# Altium PCB Carte_MiniPAMI 2025.PcbDoc
Units mm, origin at the board's own origin, x right, y up, seen from the top; angles counter-clockwise.
Board outline 21 x 11 mm, 2 copper layers (Component Side, Solder Side), stack 1.57 mm thick; 21 components, 12 nets, 51 pads, 19 vias.
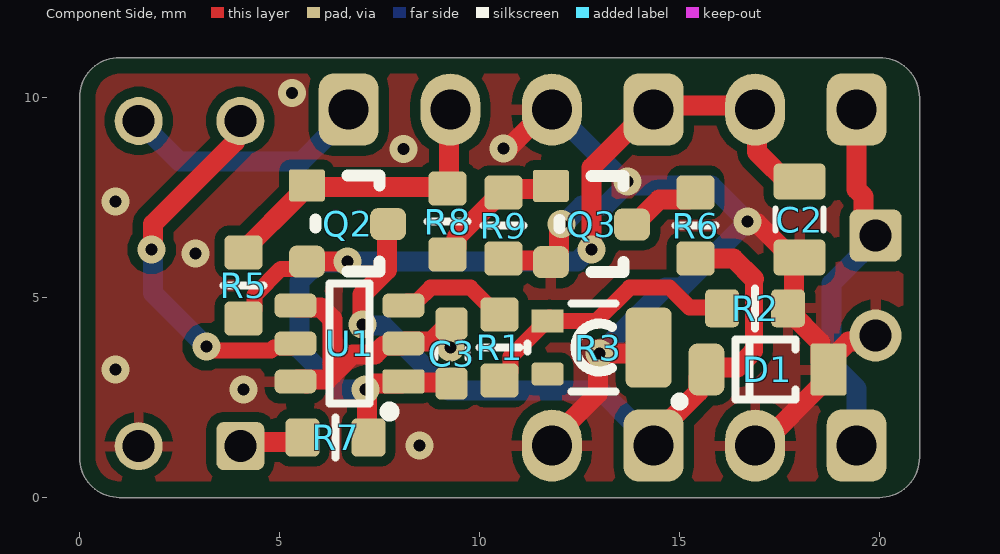
[diagram p0: Component Side view]
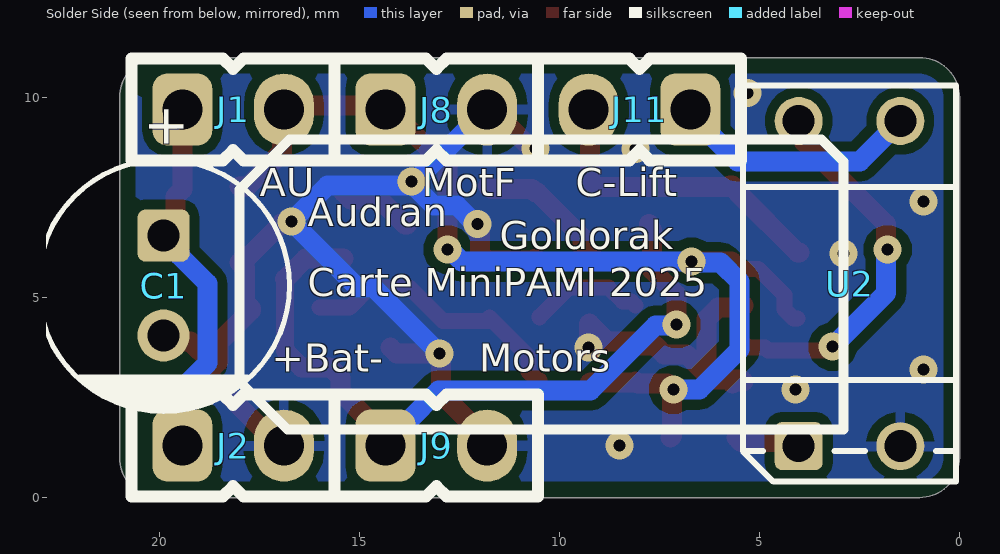
[diagram p1: Solder Side view, seen from below]
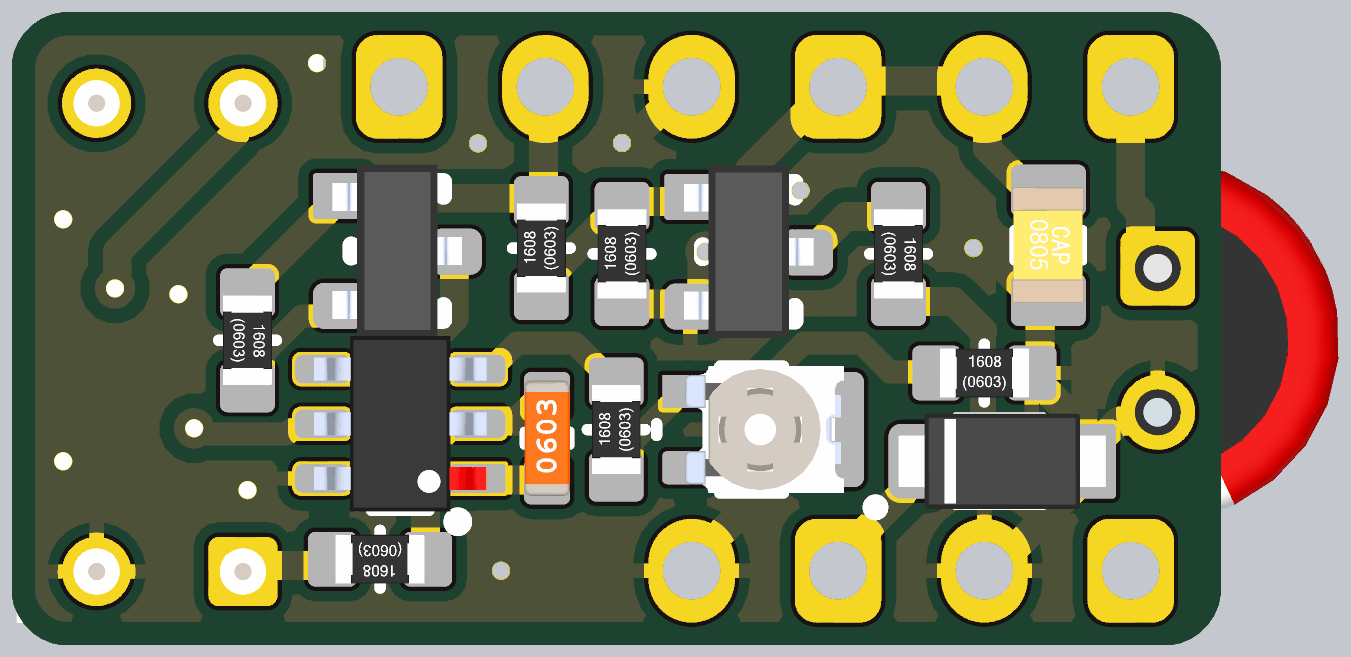
[diagram p2: 3D render of the assembled board from above, using the file's embedded part models]

## Layer stack, top to bottom
Top Solder: solder mask 0.01, Solder Resist, Dk 3.5
Component Side: signal copper 0.035
Dielectric 1: core 1.5, FR-4, Dk 4.8
Solder Side: signal copper 0.035
Bottom Solder: solder mask 0.01, Solder Resist, Dk 3.5

## Board outline
0,1 ccw(c1,1) 1,0 20,0 ccw(c20,1) 21,1 21,10 ccw(c20,10) 20,11 1,11 ccw(c1,10) 0,10

## Design rules (kind name [scope] priority, off if disabled: settings)
AssemblyTestPointUsage [All] p1 off:
AssemblyTestpoint [All] p1 off: testpointundercomponent=TRUE minsize=1.016 maxsize=2.54 preferedsize=1.524 minholesize=0 maxholesize=1.016 preferedholesize=0.813 testpointgrid=0.025 usegrid=TRUE gridtolerance=0 allowsidetop=TRUE allowsidebottom=TRUE
BoardOutlineClearance BoardOutlineClearance-Silk [All - OnSilkscreen] p1: gap=0.4 ignorepadtopadclearanceinfootprint=FALSE
BoardOutlineClearance BoardOutlineClearance_all [All] p2 off: gap=0.4 ignorepadtopadclearanceinfootprint=FALSE
Clearance Clearance_polygon [InPolygon] p1: gap=0.25 ignorepadtopadclearanceinfootprint=FALSE
Clearance Clearance_for_power_net [InNetClass('Power') vs InNet('GND')] p2: gap=0.2 ignorepadtopadclearanceinfootprint=TRUE except(0: Arc-Hole Track-Hole SMDPad-Hole THPad-Hole Via-Hole Fill-Hole Poly-Hole Region-Hole Text-Hole)
Clearance Clearance_general [All] p3: gap=0.15 ignorepadtopadclearanceinfootprint=FALSE
ComponentClearance [All] p1: gap=0 collisioncheckmode=3 verticalgap=0 showdistances=FALSE
DiffPairsRouting [All] p1 off: maxlimit=0.254 minlimit=0.127 mostfreqgap=0.254 toplayer_minwidth=0.381 toplayer_maxwidth=0.381 toplayer_prefwidth=0.381 bottomlayer_minwidth=0.381 bottomlayer_maxwidth=0.381 bottomlayer_prefwidth=0.381 maxuncoupledlength=12.7
FabricationTestPointUsage TestPointUsage [All] p1 off: valid=0 allowmultiple=FALSE
FabricationTestpoint Testpoint [All] p1 off: side=3 testpointundercomponent=TRUE minsize=1.016 maxsize=2.54 preferedsize=1.524 minholesize=0 maxholesize=1.016 preferedholesize=0.813 testpointgrid=0.025 allowsidetop=TRUE allowsidebottom=TRUE usegrid=TRUE gridtolerance=0
FanoutControl Fanout_BGA [IsBGA] p1 off: bgadir=Out bgaviamode=Centered fanoutstyle=Auto fanoutdirection=Alternating viagrid=0.025 // Fanout_BGA (Default Rule)
FanoutControl Fanout_LCC [IsLCC] p2 off: bgadir=Out bgaviamode=Centered fanoutstyle=Auto fanoutdirection=Alternating viagrid=0.025 // Fanout_LCC (Default Rule)
FanoutControl Fanout_SOIC [IsSOIC] p3 off: bgadir=Out bgaviamode=Centered fanoutstyle=Auto fanoutdirection=Alternating viagrid=0.025 // Fanout_SOIC (Default Rule)
FanoutControl Fanout_Small [(CompPinCount < 5)] p4 off: bgadir=Out bgaviamode=Centered fanoutstyle=Auto fanoutdirection=OutThenIn viagrid=0.025 // Fanout_Small (Default Rule)
FanoutControl Fanout_Default [All] p5 off: bgadir=Out bgaviamode=Centered fanoutstyle=Auto fanoutdirection=Alternating viagrid=0.025 // Fanout_Default (Default Rule)
Height [All] p1: minheight=0 maxheight=50 prefheight=10
HoleSize [All] p1: absolutevalues=TRUE maxlimit=6.3 minlimit=0.2 maxpercent=80.000 minpercent=20.000
HoleToHoleClearance [All] p1: gap=0.4 allowstackedmicrovias=TRUE
MinimumAnnularRing [All] p1: minimumring=0.076
MinimumSolderMaskSliver [All] p1: minsoldermaskwidth=0.1
MinimumSolderMaskSliver SilkscreenOverComponentPads [All] p2 off: minsoldermaskwidth=0.254
NetAntennae [All] p1 off: netantennaetolerance=0
PlaneClearance [All] p1: clearance=0.5
PlaneConnect [All] p1: planeconnectstyle=Relief reliefexpansion=0.4 reliefentries=4 reliefconductorwidth=0.3 reliefairgap=0.2
PolygonConnect PolygonConnect_Via_Power [InNetClass('PWR_20A') OR InNetClass('PWR_35A')] p1: connectstyle=Direct reliefconductorwidth=0.25 reliefentries=4 polygonreliefangle="90 Angle" airgapwidth=0.254
PolygonConnect [All] p2: thpad.connectstyle=Relief thpad.reliefconductorwidth=0.25 thpad.reliefentries=4 thpad.polygonreliefangle="90 Angle" thpad.airgapwidth=0.254 smdpad.connectstyle=Relief smdpad.reliefconductorwidth=0.25 smdpad.reliefentries=4 smdpad.polygonreliefangle="90 Angle" smdpad.airgapwidth=0.254 via.connectstyle=Direct via.reliefconductorwidth=0.25 via.reliefentries=4 via.polygonreliefangle="90 Angle" via.airgapwidth=0.254
PolygonConnect PolygonConnect_Via_GND [All vs InNet('GND')] p3: connectstyle=Direct reliefconductorwidth=0.25 reliefentries=4 polygonreliefangle="90 Angle" airgapwidth=0.254
RoutingCorners [All] p1: cornerstyle=45-Degree minsetback=1.5 maxsetback=2.54
RoutingVias [All] p1: holewidth=0.3 width=0.7 viastyle="Through Hole" minholewidth=0.3 minwidth=0.7 maxholewidth=0.3 maxwidth=1 useviatemplates=TRUE viatemplateguid#1={CC21C772-8D81-4508-B807-0997536BFA33} viatemplatename#1=v70h30m0mx0
SilkToSilkClearance [All] p1 off: silktosilkclearance=0.1
SilkToSolderMaskClearance [IsPad] p1 off: minsilkscreentomaskgap=0.254 clearancetoexposedcopper=TRUE
SolderMaskExpansion [All] p1: expansion=0.075 istentingtop=FALSE
Width [All] p1: maxlimit=15 minlimit=0.127 preferedwidth=0.2
9 further rules are at their usual default settings.

## Components (designator, comment, footprint, x,y, rotation, side; value= is the part's Value field where it differs from the comment)
C1 "220 uF" WCAP-ATG8_6.3x11x2.5x0.5 19.9,5.3 r90 bottom
C2 "10uF" "WCAP-CSGP_0805, 2x1.25x1.25" 18,6.95 r270 top
C3 "100nF" "WCAP-CSGP_0603, 1.6x0.8x0.8" 9.3,3.6 r90 top
D1 "RBR3MM40ATFTR" SOD-123FL 17.2,3.2 r180 top value=40V
J1 "22-03-2021" Conn_22-03-2021 18.16,9.7 r0 bottom
J2 "22-03-2021" Conn_22-03-2021 18.16,1.3 r0 bottom
J8 "22-03-2021" Conn_22-03-2021 13.08,9.7 r0 bottom
J9 "22-03-2021" Conn_22-03-2021 13.08,1.3 r0 bottom
J11 "22-03-2021" Conn_22-03-2021 8,9.7 r180 bottom
Q2 "ZXM61P03FTA" SOT-23 6.7,6.85 r270 top
Q3 "IRLML0040TRPBF" SOT-23 12.8,6.837 r270 top
R1 "RC0603FR-0710KL" RESC1608X06N 10.5,3.75 r90 top value=10k
R2 "" RESC1608X06N 16.89,4.732 r0 top value=33k
R3 "EVM2WSX80B54" TRIM_PANASONIC_EVM-2W 13,3.75 r270 top value=50k
R5 "RC0603FR-07100KL" RESC1608X06N 4.1,5.3 r270 top value=100k
R6 "RC0603FR-07330RL" RESC1608X06N 15.4,6.8 r270 top value=330
R7 "RC0603FR-07330RL" RESC1608X06N 6.4,1.5 r180 top value=330
R8 "RC0603FR-071KL" RESC1608X06N 9.2,6.9 r90 top value=1k
R9 "RC0603FR-07100KL" RESC1608X06N 10.6,6.8 r90 top value=100k
U1 "TPL5110DDCT" SOT23_95P280X145-6N 6.75,3.85 r180 top
U2 "OPB620" OPB620 2.75,5.35 r90 bottom

## Footprints (in the part's own frame and the unit in brackets; to place one, negate y for a bottom-side part, rotate by r counter-clockwise, add the part's x,y. Pads: shape width x height; smd on the part's side, far side on the other; paste and mask are expansions set on the pad)
Conn_22-03-2021 [mm]
  rrect50% 1.5x1.8 hole 1: 1(1.27,0)
  oval 1.5x1.8 hole 1: 2(-1.27,0)
  silkscreen extent -2.54,-1.27 2.54,1.27, body extent -2.54,-1.27 2.54,1.27, height 11.6
OPB620 [mm]
  rrect30% 1.2x1.2 hole 0.8: 1(-4.064,1.27)
  round 1.2 hole 0.8: 2(-4.064,-1.27) 3(4.064,-1.27) 4(4.064,1.27)
  silkscreen extent -4.95,-2.67 4.95,2.67, body extent -4.96,-2.66 4.95,2.67, height 9.37
RESC1608X06N [mm] "Chip Resistor, 2-Leads, Body 1,6x0,8mm, IPC Medium Density"
  rrect30% 0.85x0.95 smd: 1(-0.825,0) 2(0.825,0)
  silkscreen extent 0,-0.5 0,0.5, body extent -0.78,-0.43 0.78,0.43, height 0.45
SOD-123FL [mm] "SOD-123FL"
  rrect15% 0.9x1.3 smd: 1(-1.525,0)
  rrect50% 0.9x1.3 smd: 2(1.525,0)
  silkscreen extent -0.7,-0.75 2.3,0.9, body extent -1.8,-0.83 1.8,0.82, height 0.95
SOT23_95P280X145-6N [mm] "SOT23, 6-Leads, Body 3,1x3,2mm (max), Pitch 0,95mm, IPC Medium Densit"
  rrect20% 1.05x0.6 smd paste-0.05 mask+0.07: 1(-1.35,0.95)
  rrect50% 1.05x0.6 smd paste-0.05 mask+0.07: 2(-1.35,0) 3(-1.35,-0.95) 4(1.35,-0.95) 5(1.35,0) 6(1.35,0.95)
  silkscreen extent -1.13,-1.5 0.5,1.82, body extent -1.5,-1.52 1.5,1.52, height 1.45
SOT-23 [mm]
  rrect15% 0.8x0.9 smd: 1(-0.952,-1.016)
  rrect50% 0.8x0.9 smd: 2(0.953,-1.016) 3(0.013,1.016)
  silkscreen extent -1.2,-0.8 1.2,0.8, body extent -1.5,-1.13 1.5,1.13, height 1.22
TRIM_PANASONIC_EVM-2W [mm] "SMT Trimmer Potentiometers"
  rect 0.575x0.8 smd: 1(-0.662,-1.3)
  rrect30% 2x1.15 smd: 2(0,1.225)
  rrect30% 0.575x0.8 smd: 3(0.662,-1.3)
  silkscreen extent -1.1,-1.8 1.1,0.4, body extent -1.1,-1.3 1.1,1.45, height 1.05
WCAP-ATG8_6.3x11x2.5x0.5 [mm] "Polarized capacitors, Aluminum Electrolytic Capacitors, 2-Leads, Body 6.3x11x2.5x0.5"
  rrect30% 1.3x1.3 hole 0.8: 1(1.25,0)
  round 1.3 hole 0.8: 2(-1.25,0)
  silkscreen extent -3.15,-3.15 3.15,3.15, body extent -3.14,-3.15 3.15,3.15, height 11.11
"WCAP-CSGP_0603, 1.6x0.8x0.8" [mm] "WCAP-CSGP Ceramic Capacitors, size 0603, body 1.6x0.8x0.8"
  rrect30% 0.8x0.8 smd: 1(-0.75,0) 2(0.75,0)
  silkscreen extent -0.13,-0.4 0.13,0.4, body extent -1,-0.39 1,0.39, height 0.8
"WCAP-CSGP_0805, 2x1.25x1.25" [mm] "WCAP-CSGP Ceramic Capacitors, size 0805, body 2x1.25x1.25"
  rrect30% 0.9x1.3 smd: 1(-0.95,0) 2(0.95,0)
  silkscreen extent -0.28,-0.6 0.28,0.6, body extent -1,-0.63 1,0.62, height 1.25

## Part data
C1: library part "WCAP-ATG8, 860010373010", "CAP Alu 220 UF 20% 16 V", Manufacturer="Wurth Elektronik", Manufacturer Part Number=860010373010, RatedVoltage=16V, ComponentLink1Description=Datasheet, ComponentLink1URL=http://katalog.we-online.de/pbs/datasheet/860010373010.pdf, Size=6.3mmx11mm
C2: library part "WCAP-CSGP, 885012207026", "CAP CER 10uF 10V X7R 0805", Manufacturer="Wurth Elektronik", Manufacturer Part Number=885012207026, RatedVoltage=10V, SUPPLIER PART NUMBER 1=2495189, CeramicType=X7R, ComponentLink1Description=Datasheet, ComponentLink1URL=http://katalog.we-online.com/pbs/datasheet/885012207026.pdf, Size=0805, SUPPLIER 1=Farnell, SUPPLIER 2=JLCPCB, Supplier Footprint 2=0805, SUPPLIER PART NUMBER 2=C15850
C3: library part "WCAP-CSGP, 885012206095", "CAP CER 100nF 50V X7R 0603", Manufacturer="Wurth Elektronik", Manufacturer Part Number=885012206095, RatedVoltage=50V, SUPPLIER PART NUMBER 1=2495187, CeramicType=X7R, ComponentLink1Description=Datasheet, ComponentLink1URL=http://katalog.we-online.com/pbs/datasheet/885012206095.pdf, Size=0603, SUPPLIER 1=Farnell, SUPPLIER 2=JLCPCB, Supplier Footprint 2=0603, SUPPLIER PART NUMBER 2=C14663
D1: "DIODE SCHOTTKY 40V 3A SOD123-FL", ContinuousForwardCurrent=3A, Manufacturer=ROHM, SUPPLIER PART NUMBER 1=2581593, ComponentLink1Description=Datasheet, ComponentLink1URL=http://www.farnell.com/datasheets/2067190.pdf, ComponentLink2Description=Manufacturer, ComponentLink2URL=http://www.rohm.com/web/global/products/-/product/RBR3MM40ATF, Manufacturer Part Number=RBR3MM40ATFTR, SUPPLIER 1=Farnell, SUPPLIER 2=JLCPCB, Supplier Footprint 2=SOD-123, SUPPLIER PART NUMBER 2=C8598, Type=Schottky
J1 J2 J8 J9 J11: library part Conn_22-03-2021, "CONN HEADER VERT 2POS 2.54MM", Manufacturer=MOLEX, SUPPLIER PART NUMBER 1=9731075, ComponentLink1Description=Datasheet, ComponentLink1URL=http://www.farnell.com/datasheets/1791308.pdf, ComponentLink2Description=Drawings, ComponentLink2URL="http://www.farnell.com/cad/495071.pdf  http://www.farnell.com/cad/1533907.pdf  http://www.farnell.com/cad/1533907.pdf", Manufacturer Part Number=22-03-2021, SUPPLIER 1=Farnell
Q2: "MOSFET P-CH 30V 1.1A SOT23-3", Manufacturer="Diodes Incorporated", SUPPLIER PART NUMBER 1=9227673, ComponentLink1Description=Datasheet, ComponentLink1URL=https://www.diodes.com/assets/Datasheets/ZXM61P03F.pdf, Manufacturer Part Number=ZXM61P03FTA, SUPPLIER 1=Rs, SUPPLIER 2=JLCPCB, Supplier 3=Evolutek, Supplier Footprint 2=SOT-23-3, SUPPLIER PART NUMBER 2=C156274
Q3: library part IRLML0040, "MOSFET N 40V 3.6A SOT23", Manufacturer="INTERNATIONAL RECTIFIER", SUPPLIER PART NUMBER 1=1831088, ComponentLink1Description=Datasheet, ComponentLink1URL=http://www.irf.com/product-info/datasheets/data/irlml0040pbf.pdf, Manufacturer Part Number=IRLML0040TRPBF, SUPPLIER 1=Farnell
R1: "RES SMD 10K OHM 1% 1/10W 0603", Manufacturer=Yageo, POWER=100mW, SUPPLIER PART NUMBER 1=9238603, ComponentLink1Description=Manufacturer, ComponentLink1URL=http://www.yageo.com/NewPortal/_en/index.jsp, ComponentLink2Description=Datasheet, ComponentLink2URL=http://www.farnell.com/datasheets/2167052.pdf, Manufacturer Part Number=RC0603FR-0710KL, Precision=±1%, SUPPLIER 1=Farnell, SUPPLIER 2=JLCPCB, Supplier Footprint 2=0603, SUPPLIER PART NUMBER 2=C25804, Type="Thick Film", Vmax=50V
R2: library part RC0603FR-0710KL, "RES SMD 33K OHM 1% 1/10W 0603", Manufacturer=Yageo, POWER=100mW, SUPPLIER PART NUMBER 1=9238603, ComponentLink1Description=Manufacturer, ComponentLink1URL=http://www.yageo.com/NewPortal/_en/index.jsp, ComponentLink2Description=Datasheet, ComponentLink2URL=http://www.farnell.com/datasheets/2167052.pdf, Precision=±1%, SUPPLIER 1=Farnell, SUPPLIER 2=JLCPCB, Supplier Footprint 2=0603, SUPPLIER PART NUMBER 2=C25804, Type="Thick Film", Vmax=50V
R3: "TRIMMER 50K OHM 0.15W SMD", Manufacturer="PANASONIC ELECTRONIC COMPONENTS", POWER=150mW, SUPPLIER PART NUMBER 1=1849775, ComponentLink1Description=Datasheet, ComponentLink1URL=http://www.farnell.com/datasheets/2244143.pdf, Manufacturer Part Number=EVM2WSX80B54, SUPPLIER 1=Farnell
R5 R9: "RES SMD 100K OHM 1% 1/10W 0603", Manufacturer=Yageo, POWER=100mW, SUPPLIER PART NUMBER 1=2309107, ComponentLink1Description=Manufacturer, ComponentLink1URL=http://www.yageo.com/NewPortal/_en/index.jsp, ComponentLink2Description=Datasheet, ComponentLink2URL=http://www.farnell.com/datasheets/2167052.pdf, Manufacturer Part Number=RC0603FR-07100KL, Precision=±1%, SUPPLIER 1=Farnell, SUPPLIER 2=JLCPCB, Supplier Footprint 2=0603, SUPPLIER PART NUMBER 2=C25803, Type="Thick Film", Vmax=50V
R6 R7: "RES SMD 330 OHM 1% 1/10W 0603", Manufacturer=Yageo, POWER=100mW, SUPPLIER PART NUMBER 1=9238425, ComponentLink1Description=Manufacturer, ComponentLink1URL=http://www.yageo.com/NewPortal/_en/index.jsp, ComponentLink2Description=Datasheet, ComponentLink2URL=http://www.farnell.com/datasheets/2167052.pdf, Manufacturer Part Number=RC0603FR-07330RL, Precision=±1%, SUPPLIER 1=Farnell, SUPPLIER 2=JLCPCB, Supplier Footprint 2=0603, SUPPLIER PART NUMBER 2=C23138, Type="Thick Film", Vmax=50V
R8: "RES SMD 1K OHM 1% 1/10W 0603", Manufacturer=Yageo, POWER=100mW, SUPPLIER PART NUMBER 1=9238484, ComponentLink1Description=Manufacturer, ComponentLink1URL=http://www.yageo.com/NewPortal/_en/index.jsp, ComponentLink2Description=Datasheet, ComponentLink2URL=http://www.farnell.com/datasheets/2167052.pdf, Manufacturer Part Number=RC0603FR-071KL, Precision=±1%, SUPPLIER 1=Farnell, SUPPLIER 2=JLCPCB, Supplier Footprint 2=0603, SUPPLIER PART NUMBER 2=C21190, Type="Thick Film", Vmax=50V
U1: "IC OSC PROG TIMER TSOT23-6", Manufacturer="TEXAS INSTRUMENTS", SUPPLIER PART NUMBER 1=3121221, ComponentLink1Description=Datasheet, ComponentLink1URL=https://www.ti.com/lit/ds/symlink/tpl5110.pdf, Manufacturer Part Number=TPL5110DDCT, SUPPLIER 1=Farnell, SUPPLIER 2=LCSC, SUPPLIER PART NUMBER 2=C125830
U2: "SENSOR OPT SLOT TRANS W/RES PCB", Manufacturer="TT ELECTRONICS", SUPPLIER PART NUMBER 1=491330, ComponentLink1Description=Datasheet, ComponentLink1URL=http://www.farnell.com/datasheets/2702441.pdf, Manufacturer Part Number=OPB620, SUPPLIER 1=Farnell

## Via types
v1: diameter 0.7, hole 0.3, Component Side to Solder Side, tented both sides, 19 vias

## Nets (pads, with @x,y where several pads share a name; then routed paths per layer and width w, separated by ;. In a path a pad name is that pad's centre, name@x,y a point inside that pad or via, vN(x,y) a via of type N, cw(c..) or ccw(c..) an arc to the next point about the centre after c; other vN are vias at no path point)
3L: C2.1 C3.1 J1.2 J8.1 Q2.2 R5.2 R7.1 U1.1 | length 27.2
  Component Side w0.4: R5.2@4.05,4.475 4.15,4.475 4.375,4.7 4.375,5.057 5.036,5.718 5.505,5.718 Q2.2
  Component Side w0.5: Q2.2@5.7,5.9 5.701,5.899 6.699,5.899 v1(6.7,5.9) ; v1(7.151,2.7) v1@7.138,2.687 ; R7.1 7.188,1.537 7.188,2.637 v1@7.138,2.687 ; C3.1@9.25,2.85 9.225,2.875 8.125,2.875 U1.1 8.05,2.85 7.301,2.85 v1@7.138,2.687 ; v1(12.8,6.2) 12.8,8.25 14.35,9.8 J1.2@16.89,9.8 ; J1.2@16.89,9.35 16.941,9.299 16.941,8.634 17.8,7.775 C2.1@18,7.775
  Solder Side w0.5: v1(7.151,2.7) 6.5,2.7 5.5,3.7 5.5,5.4 5.972,5.872 6.672,5.872 v1(6.7,5.9) 12.446,5.9 12.746,6.2 v1(12.8,6.2)
BATT: C1.1 J1.1 J2.1 | length 9
  Component Side w0.5: J1.1@19.43,9.35 19.43,7.7 19.6,7.53 19.6,6.95 C1.1@20,6.55
  Solder Side w0.5: J2.1@19.43,1.35 19.43,2.727 18.8,3.357 18.8,5.35 19.5,6.05 19.5,6.15 C1.1
BRAKE: J11.2 Q2.1 R5.1 R8.2 | length 7.5
  Component Side w0.5: R5.1@4,6.125 4.05,6.125 5.534,7.609 5.534,7.652 Q2.1 5.734,7.802 5.773,7.764 9.161,7.764 9.235,7.837 9.235,9.315 J11.2@9.27,9.35
GND: C1.2 C2.2 C3.2 D1.1 J2.2 J8.2 J9.2 Q3.2 R2.2 R3.2 R9.1 U1.2 U1.4 U1.6 U2.2 | length 38.6
  Component Side w0.5: U1.4 5.45,4.75 6.032,4.75 6.325,4.457 6.325,3.082 ; U1.6@5.669,2.85 5.619,2.9 U1.6 5.45,2.95 6.193,2.95 6.82,3.577 7.386,3.577 7.609,3.8 8.05,3.8 8.15,3.9 8.8,3.9 9.25,4.35 9.26,4.34 9.26,3.76 v1(9.27,3.75) ; R9.1 10.645,5.93 11.739,5.93 Q3.2 11.934,6.035 11.984,6.035 11.984,6.719 12.05,6.785 v1(12.05,6.84) ; v1@10.6,8.7 10.663,8.763 10.752,8.763 11.689,9.7 J8.2 ; J9.2@11.75,1.39 12.962,2.602 12.962,3.562 v1(13,3.6) 14.075,3.6 R3.2 ; v1(16.7,6.9) 16.738,6.862 16.938,6.862 17.925,5.875 18,5.875 17.857,5.732 17.857,4.874 R2.2 17.715,4.682 18.525,3.872 18.525,3.4 D1.1 ; J2.2@16.89,1 16.89,1.165 18.725,3 D1.1 ; C1.2@20,4.05 19.847,3.897 19.222,3.897 18.725,3.4 D1.1
  Solder Side w0.5: J8.2 11.827,9.7 13.7,7.827 v1@13.7,7.8 ; v1(12.05,6.84) 12.104,6.84 12.565,7.3 13.152,7.3 13.652,7.8 v1@13.7,7.8 ; v1(13,3.6) 14.65,5.25 15.05,5.25 v1(16.7,6.9) 15.8,7.8 v1@13.7,7.8
  other v1: 8.5,1.3 4.1,2.7 0.9,3.2 2.9,6.1 0.9,7.4 13.7,7.9 8.1,8.717 10.6,8.724 5.306,10.111
MOTOR: D1.2 J9.1 Q2.3 R6.2 | length 19.1
  Component Side w0.45: 16.865,3.665 16.865,5.46
  Component Side w0.5: v1(7.075,4.327) 7.075,5.078 7.687,5.69 7.687,6.687 7.766,6.766 Q2.3@7.766,6.837 ; J9.1 J9.1@14.35,1.35 ; J9.1@14.773,1.773 14.773,1.64 14.482,1.35 J9.1@14.35,1.35 ; R6.2 16.35,5.975 16.865,5.46 ; D1.2@15.475,2.975 15.475,2.643 14.35,1.518 J9.1@14.35,1.35 ; D1.2@15.475,3 D1.2 ; D1.2@15.75,3.25 16.45,3.25 16.8,3.6
  Solder Side w0.5: v1(7.075,4.327) 7.104,4.298 7.602,4.298 9.223,2.677 13.023,2.677 13.827,1.873 13.86,1.873 14.35,1.382 J9.1@14.35,1.35
NetQ3_1: Q3.1 R8.1 R9.2 | length 3.4
  Component Side w0.5: R8.1 9.25,6.075 9.425,6.25 9.425,6.5 10.55,7.625 R9.2 10.682,7.707 11.702,7.707 Q3.1
NetQ3_3: Q3.3 R6.1 | length 1.9
  Component Side w0.5: Q3.3 13.866,6.825 14.491,7.45 15.225,7.45 R6.1
NetR1_1: R1.1 R2.1 R3.1 | length 7
  Component Side w0.4: R1.1 10.55,2.925 10.775,3.15 10.775,3.525 R3.1@11.75,4.5 ; R3.1 12.912,4.412 13.75,5.25 14.75,5.25 15.25,4.75 R2.1@16,4.75
NetR1_2: R1.2 U1.3 | length 2.9
  Component Side w0.4: U1.3 8.2,4.9 8.425,4.9 8.775,5.25 9.775,5.25 10.5,4.525 R1.2@10.5,4.5
OPB_A: R7.2 U2.1 | length 1.6
  Component Side w0.5: U2.1 4.127,1.393 5.468,1.393 R7.2
OPB_D: U1.5 U2.4 | length 9.5
  Component Side w0.4: v1(3.173,3.773) 3.254,3.773 3.352,3.675 4.791,3.675 4.866,3.75 5.3,3.75 U1.5
  Component Side w0.5: v1(1.8,6.2) 1.838,6.238 1.838,6.838 3.886,8.886 3.886,9.28 U2.4
  Solder Side w0.5: v1(1.8,6.2) 1.838,6.162 1.838,5.107 v1(3.173,3.773)
OPB_S: J11.1 U2.3 | length 6.1
  Solder Side w0.5: U2.3 2.494,8.4 5.548,8.4 6.23,9.082 6.498,9.35 J11.1@6.73,9.35
pads on no net: R3.3

## Polygon pours and split planes (outlines as drawn)
GND on Solder Side "NONET_L-01_P-001" (solid, pour order 1): 0,1 ccw(c1,1) 1,0 20,0 ccw(c20,1) 21,1 21,10 ccw(c20,10) 20,11 1,11 ccw(c1,10) 0,10
GND on Component Side "NONET_L-01_P-001" (solid, pour order 0): 0,1 ccw(c1,1) 1,0 20,0 ccw(c20,1) 21,1 21,10 ccw(c20,10) 20,11 1,11 ccw(c1,10) 0,10

## Silkscreen, mask and mechanical layers (free items; w line width, h text height)
Bottom Overlay:
  lines w0.254: 2.9,1.7 16.8,1.7 18,2.9 18,7.7 16.75,8.95 3.45,8.95 2.9,8.4 2.9,1.7
  text "AU         MotF     C-Lift" at 17.5,7.3 h1.2
  text "Audran" at 16.3,6.55 h1.2
  text "Goldorak" at 11.497,5.975 h1.2
  text "Carte MiniPAMI 2025" at 16.3,4.8 h1.2
  text "+Bat-        Motors" at 17.2,2.907 h1.2
Board Outline:
  the board outline again, w0.1

## Dimensions
1,0 to 1,11 on Dimension
0,1 to 21,1 on Dimension

## Text inside footprints (layer, text, board x,y; h text height)
C1: Bottom Overlay "+" at 19.4,8.7 h1 r270; Bottom 3D Body "+" at 19.4,7.5 h1 r270